# Altium PCB radxa_nx5_io_board_v1.4.PcbDoc (part 5 of 6)
Units mil, origin at the board's own origin, x right, y up, seen from the top; angles counter-clockwise.
Board outline 3937.73 x 3112.19 mil, 6 copper layers (Top, GND02, 内层3, Power4, 内层 5, Bottom), stack 58.1 mil thick; 363 components, 344 nets, 1618 pads, 1594 vias.
Unrouted connection lines stored in the file: 899.
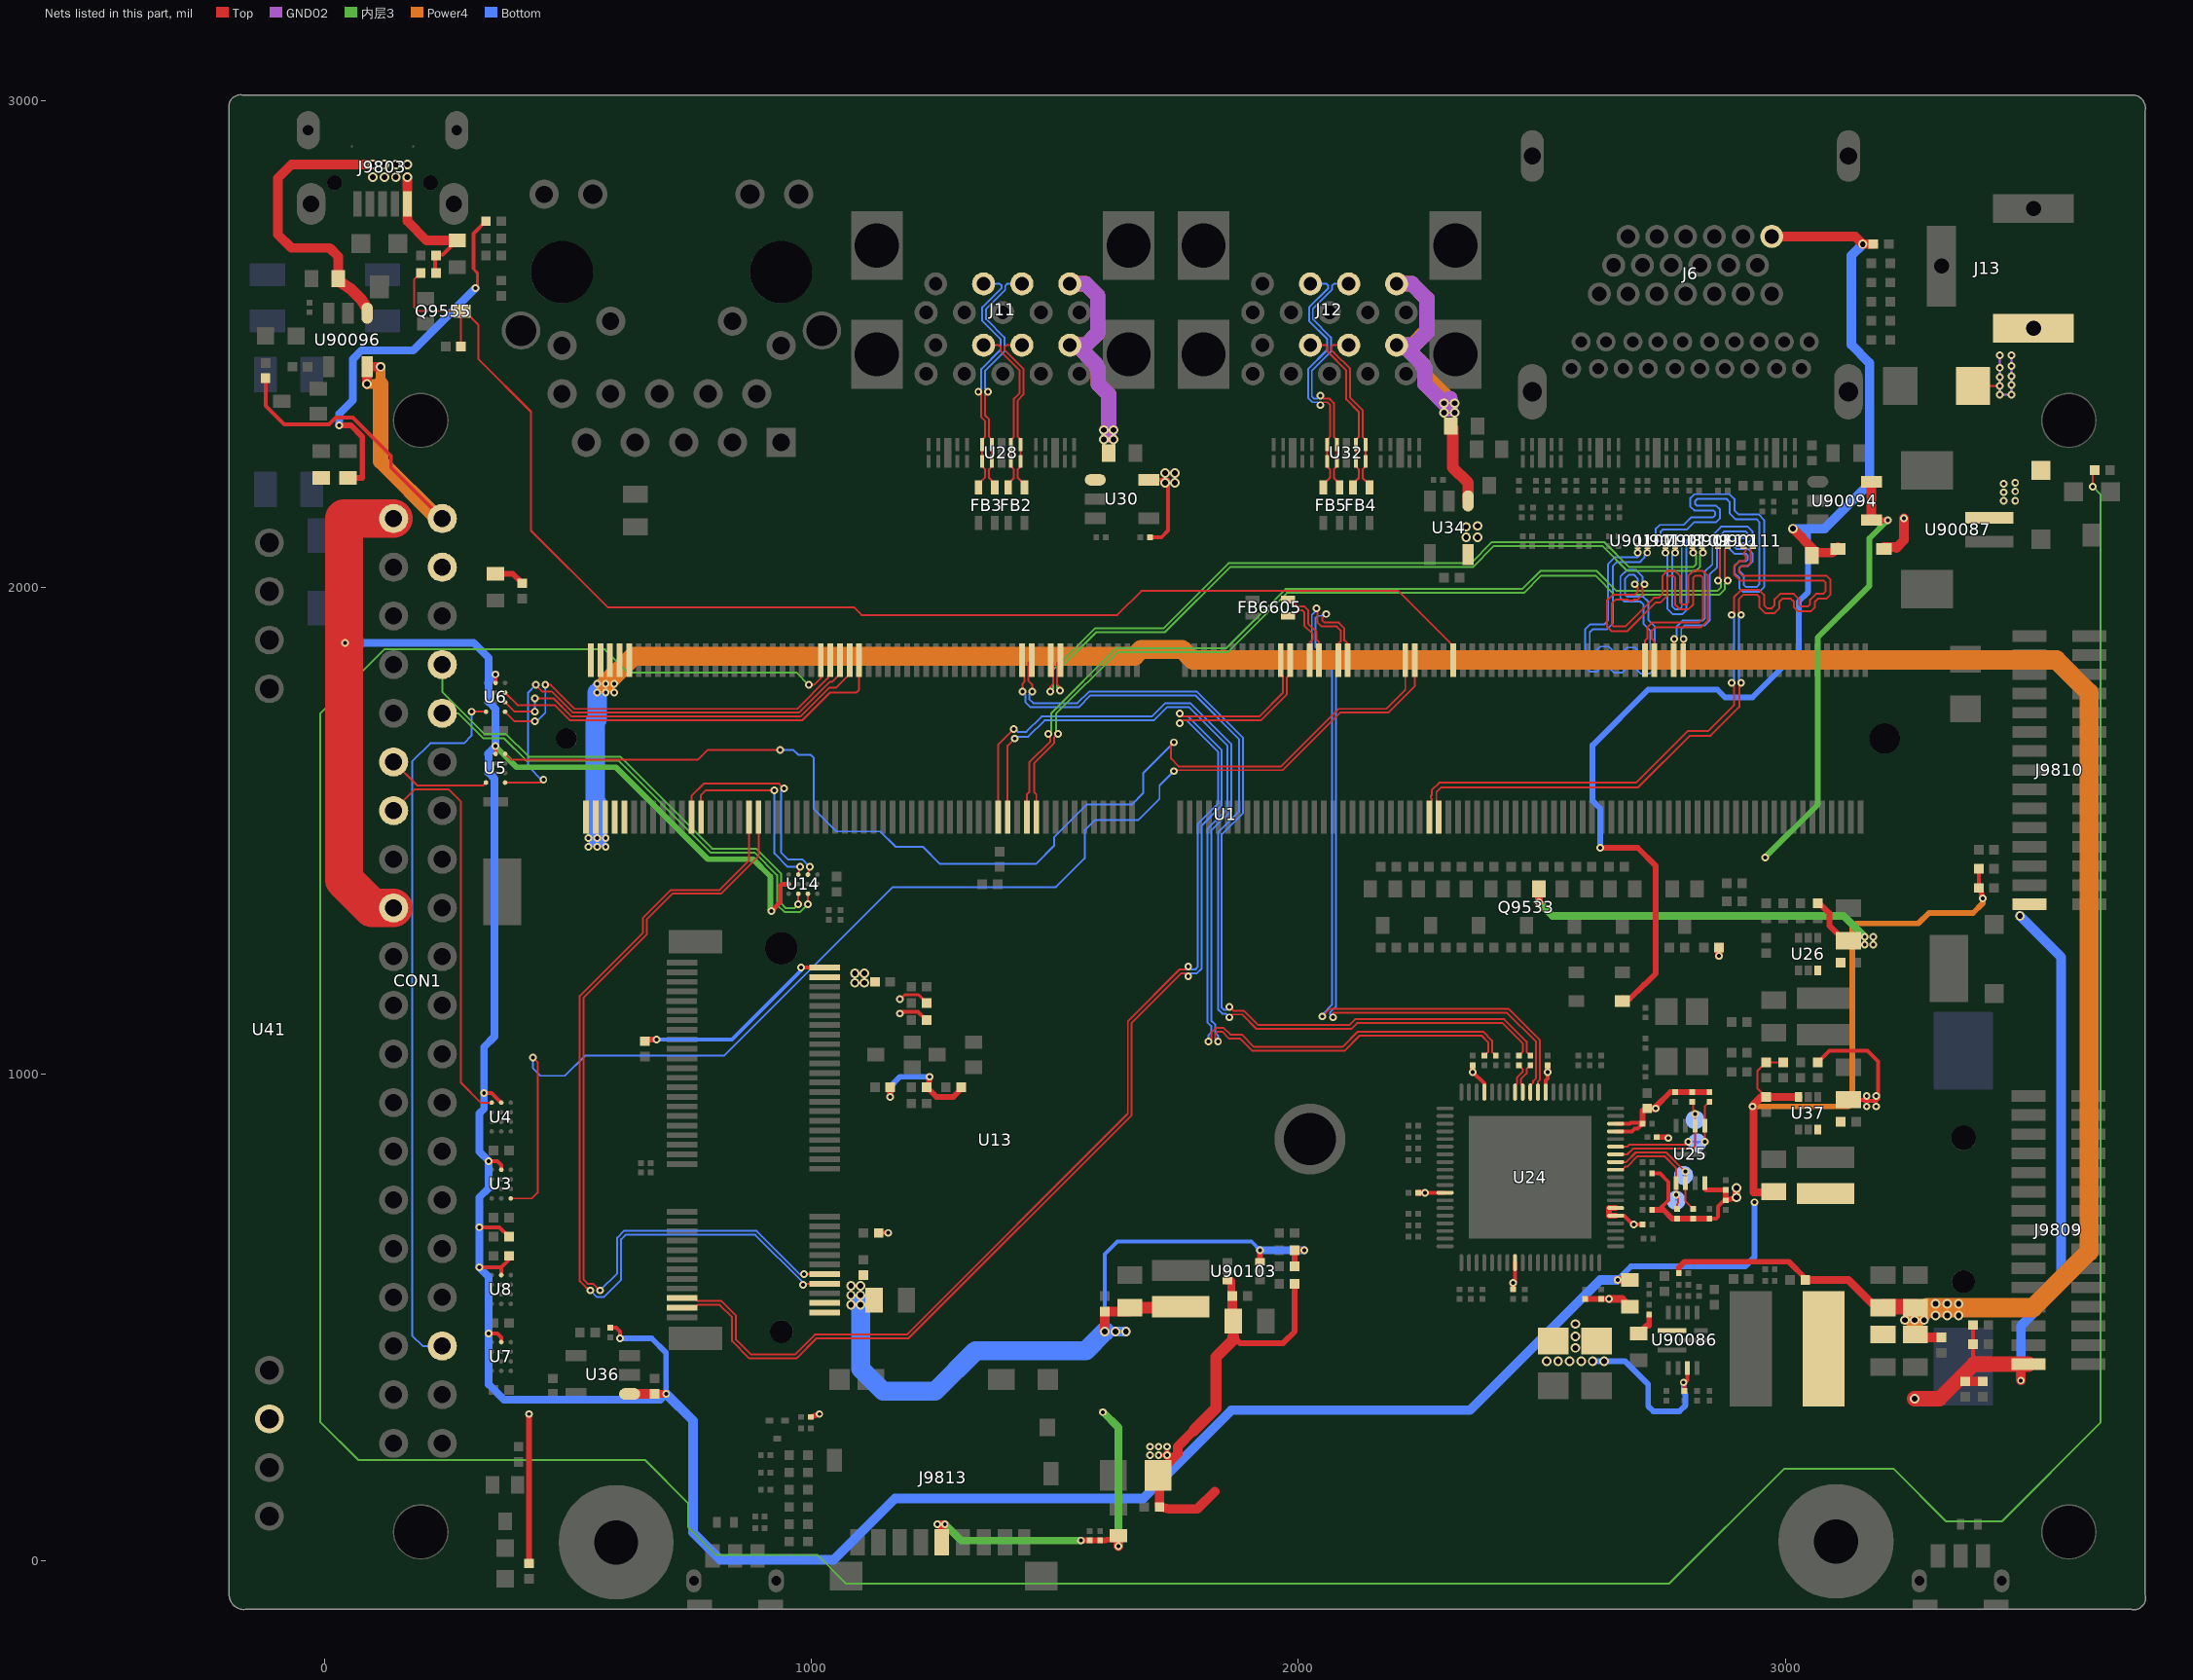
[diagram p8: the nets of this part, all layers, seen from the top]

## Via types
v1: diameter 15.75, hole 7.87, Top to Bottom, 1425 vias
v2: diameter 19.68, hole 11.81, Top to Bottom, 169 vias

## Nets (pads, with @x,y where several pads share a name; then routed paths per layer and width w, separated by ;. In a path a pad name is that pad's centre, name@x,y a point inside that pad or via, vN(x,y) a via of type N, cw(c..) or ccw(c..) an arc to the next point about the centre after c; other vN are vias at no path point) (continued)
SPI1-SCK: CON1.13 U4.A1 | length 824.6
  Top w3.94: CON1.13@140.94,1540.94 184.65,1584.65 253.94,1584.65 279.53,1559.06 279.53,981.61 320.19,940.94 U4.A1@342.52,940.94
SPI_CK: R107.1 TP3.1 U24.50 U25.6 | length 261.2
  Top w3.94: U24.50@2651.57,818.9 2673.23,818.9 2692.91,838.58 2755.23,838.58 v1@2795.28,798.54 ; v1(2795.28,799.21) v1@2795.28,798.54 ; R107.1@2811.02,722.44 2795.28,738.19 U25.6@2795.28,775.59 v1@2795.28,798.54
  Bottom w3.94: TP3.1@2791.34,791.34 2795.28,795.28 v1(2795.28,799.21)
SPI_CZ: R102.2 TP1.1 U24.52 U25.1 | length 301.4
  Top w3.94: U24.52@2651.57,850.39 2675.2,850.39 2679.13,854.33 2795.28,854.33 v1(2801.18,860.24) ; v1(2834.65,860.24) U25.1@2834.65,893.7 2834.65,933.07 R102.2@2844.49,942.91
  Bottom w3.94: TP1.1@2818.9,858.27 2821.41,858.27 2823.38,860.24 v1(2801.18,860.24) v1(2834.65,860.24)
SPI_DI: R104.2 TP2.1 U24.51 U25.2 | length 275.5
  Top w3.94: U24.51@2651.57,834.65 2675.2,834.65 2687.01,846.46 2809.06,846.46 2814.96,852.36 U25.2@2814.96,893.7 v1(2814.96,917.32) 2811.02,921.26 2811.02,940.94 R104.2@2809.06,942.91
  Bottom w3.94: TP2.1@2814.96,905.51 v1(2814.96,917.32)
SPI_DO: R108.1 TP4.1 U24.49 U25.5 | length 244.1
  Top w3.94: U24.49@2651.57,803.15 2665.35,803.15 2671.38,809.17 2675.32,809.17 2696.85,830.71 2751.97,830.71 2775.59,807.09 U25.5@2775.59,775.59 v1(2775.59,751.97) 2779.53,748.03 2779.53,734.25 2777.56,732.28 R108.1@2777.56,722.44
  Bottom w3.94: TP4.1@2775.59,740.16 v1(2775.59,751.97)
TP_INT_L: U1.97 U5.A3 | length 2333.7
  Top w3.94: U5.A3@370.08,1657.48 381.89,1645.67 766.42,1645.67 786.11,1665.35 v1(935.04,1665.35) ; v1(1744.09,1681.1) 1738.19,1675.2 1738.19,1647.64 1753.94,1631.89 1964.32,1631.89 2082.43,1750 2180.12,1750 2219.49,1789.37 U1.97@2219.49,1850.39
  Bottom w3.94: v1(935.04,1665.35) 962.6,1665.35 972.44,1655.51 998.03,1655.51 1003.94,1649.61 1003.94,1544.66 1050.56,1498.03 1140.75,1498.03 1172.24,1466.54 1228.35,1466.54 1263.78,1431.1 1460.63,1431.1 1498.03,1468.5 1498.03,1486.22 1564.96,1553.15 1657.48,1553.15 1681.1,1576.77 1681.1,1618.11 v1(1744.09,1681.1)
TP_RST_L: U1.95 U3.D3 | length 2616.3
  Top w3.94: U3.D3@381.89,744.09 425.2,744.09 437.01,755.91 437.01,1023.62 v1(427.17,1033.46) ; v1(1744.09,1622.05) 1746.06,1624.02 1967.58,1624.02 2085.69,1742.13 2184.06,1742.13 2239.17,1797.24 U1.95@2239.17,1850.39
  Bottom w3.94: v1(427.17,1033.46) 427.17,1011.81 442.91,996.06 492.86,996.06 534.2,1037.4 819.97,1037.4 1166.43,1383.86 1501.97,1383.86 1561.02,1442.91 1561.02,1499.74 1582.93,1521.65 1671.26,1521.65 1714.57,1564.96 1714.57,1592.52 v1(1744.09,1622.05)
TX_UP_N: C69.2 U24.68 | length 64.9
  Top w3.94: U24.68@2460.63,962.6 2460.63,976.38 2456.69,980.32 2456.69,988.86 2468.5,1000.68 2468.5,1009.84 C69.2@2476.38,1017.72
TX_UP_P: C68.2 U24.69 | length 64.9
  Top w3.94: U24.69@2444.88,962.6 2444.88,976.38 2448.82,980.32 2448.82,992.13 2460.63,1003.94 2460.63,1009.84 C68.2@2452.76,1017.72
TYPEC0_DM1: FB2.1 J11.2 U28.5 U28.6 | length 358.4
  Top w3.94: J11.2@1431.89,2497.24 1399.61,2497.24 1395.67,2493.31 1395.67,2487.93 1401.32,2482.28 1401.57,2482.28 1435.04,2448.82 1435.04,2395.67 1423.23,2383.86 1423.23,2309.06 1429.13,2303.15 U28.6@1429.13,2292.82 U28.5@1429.13,2258.37 1429.13,2248.03 1423.23,2242.13 1423.23,2224.41 1437.01,2210.63 FB2.1@1437.01,2204.72
TYPEC0_DM3: FB4.1 J12.2 U32.5 U32.6 | length 364.1
  Top w3.94: J12.2@2103.15,2497.24 2070.87,2497.24 2066.93,2493.31 2066.93,2487.93 2072.58,2482.28 2072.83,2482.28 2106.3,2448.82 2106.3,2389.09 2131.89,2363.5 2131.89,2309.06 2137.8,2303.15 U32.6@2137.8,2292.82 U32.5@2137.8,2258.37 2137.8,2248.03 2131.89,2242.13 2131.89,2224.41 2145.67,2210.63 FB4.1@2145.67,2204.72
TYPEC0_DP1: FB2.3 J11.3 U28.4 U28.7 | length 356.3
  Top w3.94: J11.3@1353.15,2497.24 1384.65,2497.24 1387.8,2494.09 1387.8,2484.67 1427.17,2445.3 1427.17,2398.93 1415.35,2387.12 1415.35,2309.06 1409.45,2303.15 U28.7@1409.45,2292.82 U28.4@1409.45,2258.37 1409.45,2248.03 1415.35,2242.13 1415.35,2224.41 1403.54,2212.6 FB2.3@1403.54,2204.72
TYPEC0_DP3: FB4.3 J12.3 U32.4 U32.7 | length 362
  Top w3.94: J12.3@2024.41,2497.24 2055.91,2497.24 2059.06,2494.09 2059.06,2484.67 2098.43,2445.3 2098.43,2385.83 2124.02,2360.24 2124.02,2309.06 2118.11,2303.15 U32.7@2118.11,2292.82 U32.4@2118.11,2258.37 2118.11,2248.03 2124.02,2242.13 2124.02,2224.41 2112.2,2212.6 FB4.3@2112.2,2204.72
TYPEC0_OTG_DM: FB6605.2 U1.115 | length 162
  Top w3.94: FB6605.2@1978.35,1974.41 1984.25,1974.41 1998.03,1960.63 2011.81,1960.63 2019.69,1952.76 2019.69,1925.2 2037.4,1907.48 2037.4,1891.73 2042.32,1886.81 U1.115@2042.32,1850.39
TYPEC0_OTG_DP: FB6605.4 U1.117 | length 148.6
  Top w3.94: FB6605.4@1978.35,1940.94 1986.22,1940.94 1998.03,1952.76 2007.87,1952.76 2011.81,1948.82 2011.81,1921.26 2029.53,1903.54 2029.53,1892.72 2022.64,1885.83 U1.117@2022.64,1850.39
TYPEC0_SBU1: R95225.1 U1.92 U90111.3 | length 1555.1
  Top w3.94: U1.92@2268.7,1527.56 2268.7,1557.09 2273.62,1562.01 2273.62,1564.96 2271.65,1566.93 2271.65,1570.87 2273.62,1572.83 2273.62,1582.68 2289.37,1598.43 2693.9,1598.43 2800.2,1704.72 2842.38,1704.72 2894.69,1757.03 2894.69,1798.23 v1(2889.76,1803.15) ; v1(2889.76,1942.91) 2894.69,1947.83 2894.69,1979.47 2909.31,1994.09 2946.85,1994.09 2956.69,1984.25 2956.69,1962.6 2962.6,1956.69 2972.44,1956.69 2978.35,1962.6 2978.35,1975.14 2989.43,1986.22 3017.72,1986.22 3027.56,1976.38 3027.56,1964.57 3031.5,1960.63 3047.24,1960.63 3051.18,1964.57 3051.18,1974.41 3062.99,1986.22 3077.97,1986.22 3082.68,1990.93 3082.68,2009.84 3078.74,2013.78 2907.34,2013.78 2894.69,2026.43 2894.69,2041.48 2906.36,2053.15 2915.35,2053.15 2919.29,2057.09 2919.29,2062.99 2915.35,2066.93 2915.35,2070.87 2919.29,2074.8 2919.29,2081.5 U90111.3@2916.14,2084.65 R95225.1@2913.39,2084.65
  Bottom w3.94: v1(2889.76,1803.15) 2894.69,1808.07 2894.69,1937.99 v1(2889.76,1942.91)
TYPEC0_SBU1_DC: U1.224 U13.10 | length 1792.2
  Top w3.94: v1(564.96,555.12) 551.18,568.9 539.57,568.9 531.5,576.97 531.5,1154.53 531.5,1156.85 661.42,1286.77 661.42,1317.66 713.83,1370.08 814.09,1370.08 890.75,1446.73 U1.224@890.75,1527.56 ; v1(984.25,588.58) U13.10@1026.58,588.58
  Bottom w3.94: v1(564.96,555.12) 600.39,590.55 600.39,663.44 614.12,677.17 887.12,677.17 975.7,588.58 v1(984.25,588.58)
TYPEC0_SBU2: R95226.1 U1.90 U90111.4 | length 1556.1
  Top w3.94: U1.90@2288.39,1527.56 2288.39,1557.09 2283.46,1562.01 2283.46,1578.6 2293.45,1588.58 2697.97,1588.58 2804.27,1694.88 2846.46,1694.88 2905.51,1753.94 2905.51,1799.21 v1(2909.45,1803.15) ; v1(2909.45,1942.91) 2904.53,1947.83 2904.53,1975.39 2913.39,1984.25 2942.91,1984.25 2946.85,1980.32 2946.85,1958.66 2958.66,1946.85 2978.35,1946.85 2988.19,1956.69 2988.19,1970.47 2994.09,1976.38 3011.81,1976.38 3017.72,1970.47 3017.72,1958.66 3025.59,1950.79 3053.15,1950.79 3061.02,1958.66 3061.02,1970.47 3066.93,1976.38 3084.65,1976.38 3092.52,1984.25 3092.52,2015.75 3084.65,2023.62 2911.42,2023.62 2904.53,2030.51 2904.53,2037.4 2910.43,2043.31 2921.26,2043.31 2929.13,2051.18 2929.13,2078.74 U90111.4@2935.04,2084.65 R95226.1@2933.07,2084.65
  Bottom w3.94: v1(2909.45,1803.15) 2904.53,1808.07 2904.53,1937.99 v1(2909.45,1942.91)
TYPEC0_SBU2_DC: U1.226 U13.8 | length 1821.1
  Top w3.94: v1(545.28,555.12) 544.22,554.06 537.26,561.02 536.31,561.02 523.62,573.71 523.62,1157.79 523.62,1160.11 653.54,1290.04 653.54,1320.92 710.57,1377.95 810.83,1377.95 871.06,1438.19 U1.226@871.06,1527.56 ; v1(982.28,566.93) 984.25,568.9 U13.8@1026.58,568.9
  Bottom w3.94: v1(545.28,555.12) 559.06,541.34 572.83,541.34 608.27,576.77 608.27,660.18 617.38,669.29 883.86,669.29 980.32,572.83 980.32,568.9 v1(982.28,566.93)
TYPEC0_SSRX1N: R95218.1 U1.45 U90107.4 | length 1715
  Top w3.94: v1(2710.63,2005.91) 2706.69,2001.97 2706.69,1984.25 2696.85,1974.41 2688.98,1974.41 2687.01,1972.44 2679.13,1972.44 2677.17,1974.41 2651.57,1974.41 2643.7,1966.54 2643.7,1923.23 2647.64,1919.29 2671.26,1919.29 2730.32,1978.35 2740.16,1978.35 2748.03,1986.22 2748.03,2023.76 2757.73,2033.46 2773.76,2033.46 2783.46,2023.76 2783.46,1968.5 2787.4,1964.57 2797.24,1964.57 2801.18,1968.5 2801.18,2023.62 2811.02,2033.46 2830.71,2033.46 2840.55,2023.62 2840.55,1931.1 2826.77,1917.32 2732.28,1917.32 2726.38,1911.42 2726.38,1893.7 2731.3,1888.78 U1.45@2731.3,1850.39 ; v1(2716.54,2070.87) U90107.4@2716.54,2084.65
  Bottom w3.94: v1(2710.63,2005.91) 2706.69,2009.84 2706.69,2021.79 2693.05,2035.43 2675.06,2035.43 2661.42,2021.79 2661.42,1978.35 2669.29,1970.47 2702.76,1970.47 2708.66,1964.57 2708.66,1925.2 2722.44,1911.42 2722.44,1838.58 2716.54,1832.68 2707.29,1832.68 2702.76,1837.21 2702.76,1864.17 2690.94,1875.98 2675.2,1875.98 2665.35,1866.14 2665.35,1838.58 2661.42,1834.65 2651.57,1834.65 2647.64,1838.58 2647.64,1868.11 2637.8,1877.95 2620.08,1877.95 2612.2,1870.08 2612.2,1840.55 2608.27,1836.61 2602.36,1836.61 2598.43,1840.55 2598.43,1907.48 2604.33,1913.39 2633.86,1913.39 2645.67,1925.2 2645.67,2043.17 2653.68,2051.18 2700.93,2051.18 2710.63,2060.88 2710.63,2064.96 v1(2716.54,2070.87)
TYPEC0_SSRX1P: R95217.1 U1.47 U90107.3 | length 1717.4
  Top w3.94: v1(2690.94,2005.91) 2696.85,2000 2696.85,1990.16 2690.94,1984.25 2645.67,1984.25 2633.86,1972.44 2633.86,1919.15 2643.56,1909.45 2675.34,1909.45 2734.39,1968.5 2744.23,1968.5 2757.87,1982.14 2757.87,2019.69 2761.81,2023.62 2769.69,2023.62 2773.62,2019.69 2773.62,1964.43 2783.32,1954.72 2801.32,1954.72 2811.02,1964.43 2811.02,2019.55 2815.1,2023.62 2826.63,2023.62 2830.71,2019.55 2830.71,1935.04 2822.83,1927.17 2726.38,1927.17 2716.54,1917.32 2716.54,1894.69 2711.61,1889.76 U1.47@2711.61,1850.39 ; v1(2696.85,2070.87) 2696.85,2083.86 U90107.3@2697.64,2084.65 R95217.1@2696.85,2084.65
  Bottom w3.94: v1(2690.94,2005.91) 2696.85,2011.81 2696.85,2017.72 2688.98,2025.59 2679.13,2025.59 2671.26,2017.72 2671.26,1984.25 2675.2,1980.32 2708.66,1980.32 2718.5,1970.47 2718.5,1933.07 2732.28,1919.29 2732.28,1832.68 2722.44,1822.83 2702.76,1822.83 2692.91,1832.68 2692.91,1860.24 2687.01,1866.14 2679.13,1866.14 2675.2,1862.2 2675.2,1834.65 2665.35,1824.8 2647.64,1824.8 2637.8,1834.65 2637.8,1864.17 2633.86,1868.11 2625.98,1868.11 2622.05,1864.17 2622.05,1835.29 2613.53,1826.77 2598.43,1826.77 2588.58,1836.61 2588.58,1913.39 2598.43,1923.23 2627.95,1923.23 2635.83,1931.1 2635.83,2047.24 2649.61,2061.02 2696.85,2061.02 2700.79,2064.96 2700.79,2066.93 v1(2696.85,2070.87)
TYPEC0_SSRX2N: R95222.1 U1.161 U90109.4 | length 1612.6
  Top w3.94: v1(1509.84,1787.4) 1509.84,1795.28 1503.94,1801.18 1503.94,1843.5 U1.161@1510.83,1850.39 ; U90109.4@2828.74,2084.65 2828.74,2072.83 v1(2830.71,2070.87)
  内层3 w3.94: v1(1509.84,1787.4) 1505.91,1791.34 1503.94,1789.37 1503.94,1826.57 1584.84,1907.48 1725.7,1907.48 1859.56,2041.34 2358.27,2041.34 2401.57,2084.65 2624.02,2084.65 2675.2,2033.46 2816.93,2033.46 2824.8,2041.34 2824.8,2064.96 v1(2830.71,2070.87)
TYPEC0_SSRX2P: R95221.1 U1.163 U90109.3 | length 1610.7
  Top w3.94: v1(1490.16,1785.43) 1490.16,1795.28 1496.06,1801.18 1496.06,1845.47 U1.163@1491.14,1850.39 ; R95221.1@2809.06,2084.65 U90109.3@2809.84,2084.65 2809.84,2072.05 v1(2811.02,2070.87)
  内层3 w3.94: v1(1490.16,1785.43) 1496.06,1791.34 1496.06,1829.84 1581.58,1915.35 1722.44,1915.35 1856.3,2049.21 2354.33,2049.21 2397.64,2092.52 2627.95,2092.52 2679.13,2041.34 2811.02,2041.34 2816.93,2047.24 2816.93,2064.96 v1(2811.02,2070.87)
TYPEC0_SSTX1N: R95220.1 U1.39 U90108.4 | length 1529.8
  Top w3.94: v1(2773.62,2070.87) U90108.4@2773.62,2084.65 ; U1.39@2790.35,1850.39 2790.35,1892.72 v1(2791.34,1893.7)
  Bottom w3.94: v1(2773.62,2070.87) 2767.72,2064.96 2767.72,1960.63 2773.62,1954.72 2783.46,1954.72 2787.4,1958.66 2787.4,2088.1 2781.01,2094.49 2740.8,2094.49 2734.25,2101.03 2734.25,2120.08 2742.13,2127.95 2791.34,2127.95 2807.09,2143.7 2852.36,2143.7 2856.3,2147.64 2856.3,2153.54 2852.36,2157.48 2812.99,2157.48 2805.12,2165.35 2805.12,2183.07 2812.99,2190.94 2885.83,2190.94 2895.67,2181.1 2895.67,2157.48 2903.54,2149.61 2945.02,2149.61 2956.69,2137.94 2956.69,2000 2946.85,1990.16 2913.39,1990.16 2905.51,1998.03 2905.51,2019.69 2905.44,2019.69 2895.74,2029.39 2895.74,2043.52 2905.37,2053.15 2919.29,2053.15 2923.23,2057.09 2923.23,2064.96 2919.29,2068.9 2895.53,2068.9 2885.83,2078.6 2885.83,2090.69 2895.53,2100.39 2919.29,2100.39 2923.23,2104.33 2923.23,2110.24 2919.29,2114.17 2874.02,2114.17 2860.24,2100.39 2860.24,2041.34 2844.49,2025.59 2844.49,1930.96 2834.79,1921.26 2793.31,1921.26 2786.42,1914.37 2786.42,1898.62 v1(2791.34,1893.7)
TYPEC0_SSTX1P: R95219.1 U1.41 U90108.3 | length 1528.9
  Top w3.94: v1(2753.94,2070.87) 2753.94,2083.86 U90108.3@2754.72,2084.65 R95219.1@2753.94,2084.65 ; U1.41@2770.67,1850.39 2770.67,1892.72 v1(2771.65,1893.7)
  Bottom w3.94: v1(2753.94,2070.87) 2757.87,2066.93 2757.87,1955.72 2768.72,1944.88 2789.28,1944.88 2797.24,1952.85 2797.24,2094.49 2787.4,2104.33 2748.03,2104.33 2744.09,2108.27 2744.09,2114.17 2748.03,2118.11 2797.24,2118.11 2812.99,2133.86 2858.27,2133.86 2866.14,2141.73 2866.14,2159.45 2858.27,2167.32 2818.9,2167.32 2814.96,2171.26 2814.96,2177.17 2818.9,2181.1 2879.92,2181.1 2885.83,2175.2 2885.83,2151.57 2897.64,2139.76 2940.94,2139.76 2946.85,2133.86 2946.85,2005.91 2940.94,2000 2919.29,2000 2915.35,2003.94 2915.35,2023.69 2905.58,2033.46 2905.58,2039.44 2909.45,2043.31 2923.37,2043.31 2933.07,2053.01 2933.07,2069.04 2923.37,2078.74 2899.61,2078.74 2895.67,2082.68 2895.67,2086.61 2899.61,2090.55 2923.37,2090.55 2933.07,2100.25 2933.07,2114.31 2923.37,2124.02 2868.11,2124.02 2850.39,2106.3 2850.39,2047.24 2834.65,2031.5 2834.65,1935.04 2830.71,1931.1 2789.23,1931.1 2776.57,1918.45 2776.57,1898.62 v1(2771.65,1893.7)
TYPEC0_SSTX2N: R95224.1 U1.166 U90110.4 | length 1847.4
  Top w3.94: U1.166@1461.61,1527.56 1461.61,1573.82 1456.69,1578.74 1456.69,1637.8 1498.03,1679.13 1498.03,1690.94 v1(1505.91,1698.82) ; v1(2881.89,2013.78) 2875.98,2019.69 2875.98,2078.74 U90110.4@2881.89,2084.65
  内层3 w3.94: v1(1505.91,1698.82) 1501.97,1698.82 1501.97,1739.96 1628.15,1866.14 1854.33,1866.14 1976.38,1988.19 2463.02,1988.19 2498.45,2023.62 2610.24,2023.62 2649.61,1984.25 2864.17,1984.25 2875.98,1996.06 2875.98,2007.87 v1(2881.89,2013.78)
TYPEC0_SSTX2P: R95223.1 U1.168 U90110.3 | length 1845.4
  Top w3.94: U1.168@1441.93,1527.56 1441.93,1573.82 1446.85,1578.74 1446.85,1639.76 1490.16,1683.07 1490.16,1694.88 v1(1486.22,1698.82) ; v1(2862.2,2013.78) 2866.14,2019.69 2866.14,2078.74 R95223.1@2862.2,2084.65 U90110.3@2862.99,2084.65
  内层3 w3.94: v1(1486.22,1698.82) 1492.13,1704.72 1492.13,1741.25 1624.89,1874.02 1851.07,1874.02 1973.12,1996.06 2459.76,1996.06 2497.16,2033.46 2612.2,2033.46 2653.54,1992.13 2860.24,1992.13 2868.11,2000 2868.11,2007.87 v1(2862.2,2013.78)
UART1-CTS: CON1.36 U6.D1 | length 1472.7
  Top w3.94: v1(301.18,1744.09) U6.D1@330.71,1744.09
  Bottom w3.94: CON1.36@240.94,440.94 200.79,440.94 179.13,462.6 179.13,1641.73 216.54,1679.13 285.43,1679.13 301.18,1694.88 v1(301.18,1744.09)
UART1-RTS: CON1.11 U5.D1 | length 212.3
  Top w3.94: CON1.11@140.94,1640.94 189.37,1592.52 324.8,1592.52 U5.D1@330.71,1598.43
UART2-RX: U1.238 U14.C3 | length 470
  Top w3.94: U1.238@752.95,1527.56 752.95,1571.17 778.23,1596.46 933.07,1596.46 v1(942.91,1586.61) ; U14.C3@992.13,1409.45 v1(996.06,1425.2)
  Bottom w3.94: v1(942.91,1586.61) 937.01,1580.71 937.01,1454.72 950.79,1440.94 980.32,1440.94 v1(996.06,1425.2)
UART2-RX/: CON1.10 U14.C1 | length 984.3
  Top w3.94: v1(992.13,1348.43) U14.C1@992.13,1370.08
  内层3 w3.94: CON1.10@240.94,1740.94 273.71,1740.94 324.8,1689.85 367.24,1689.85 413.39,1643.7 603.04,1643.7 792.01,1454.72 882.85,1454.72 929.13,1408.44 929.13,1347.33 943.79,1332.68 976.38,1332.68 v1(992.13,1348.43)
UART2-TX: U1.236 U14.B3 | length 410.7
  Top w3.94: U1.236@772.64,1527.56 772.64,1572.83 782.48,1582.68 v1(923.23,1582.68) ; U14.B3@972.44,1409.45 v1(976.38,1425.2)
  Bottom w3.94: v1(923.23,1582.68) 923.23,1452.76 950.79,1425.2 v1(976.38,1425.2)
UART2-TX/: CON1.8 U14.B1 | length 1032.3
  Top w3.94: v1(972.44,1348.43) U14.B1@972.44,1370.08
  内层3 w3.94: CON1.8@240.94,1840.94 240.94,1784.84 326.97,1698.82 371.06,1698.82 418.31,1651.57 606.3,1651.57 795.28,1462.6 886.11,1462.6 937.01,1411.7 937.01,1350.59 947.05,1340.55 964.57,1340.55 v1(972.44,1348.43)
UART9-CTSN: U1.209 U6.D3 | length 821.8
  Top w3.94: U6.D3@370.08,1744.09 389.76,1724.41 v1(431.1,1724.41) ; v1(452.76,1799.21) 463.95,1799.21 513.16,1750 970.41,1750 1033.06,1812.64 1033.06,1817.46 1038.39,1822.79 U1.209@1038.39,1850.39
  Bottom w3.94: v1(431.1,1724.41) 435.04,1724.41 452.76,1742.13 v1(452.76,1799.21)
UART9-RTSN: U1.207 U5.D3 | length 1010.1
  Top w3.94: U5.D3@370.08,1598.43 442.91,1598.43 v1(448.82,1604.33) ; v1(433.07,1799.21) 446.85,1785.43 466.59,1785.43 509.9,1742.13 973.68,1742.13 1036.67,1805.12 1041.82,1805.12 1050.77,1814.08 1050.77,1814.55 1058.07,1821.85 U1.207@1058.07,1850.39
  Bottom w3.94: v1(433.07,1799.21) 417.32,1783.46 417.32,1631.89 446.85,1602.36 v1(448.82,1604.33)
UART9-RX: U1.205 U6.C3 | length 824
  Top w3.94: U6.C3@370.08,1763.78 389.76,1744.09 v1(431.1,1744.09) ; v1(431.1,1771.65) 469.24,1771.65 506.64,1734.25 976.94,1734.25 1035.99,1793.31 1049.69,1793.31 1077.76,1821.37 U1.205@1077.76,1850.39
  Bottom w3.94: v1(431.1,1744.09) v1(431.1,1771.65)
UART9-TX: U1.203 U6.B3 | length 838.1
  Top w3.94: U6.B3@370.08,1783.46 395.67,1757.87 471.88,1757.87 503.38,1726.38 980.2,1726.38 1037.29,1783.46 1091.54,1783.46 1097.44,1789.37 U1.203@1097.44,1850.39
USB3_DM1: FB3.1 J11.13 U28.2 U28.9 | length 516.5
  Top w3.94: v1(1362.2,2401.57) 1356.3,2395.67 1356.3,2352.36 1364.17,2344.49 1364.17,2309.06 1370.08,2303.15 U28.9@1370.08,2292.82 U28.2@1370.08,2258.37 1370.08,2248.03 1364.17,2242.13 1364.17,2224.41 1375.98,2212.6 FB3.1@1375.98,2204.72
  Bottom w3.94: v1(1362.2,2401.57) 1356.3,2407.48 1356.3,2444.77 1395.67,2484.14 1395.67,2513.1 1358.27,2550.51 1358.27,2571.68 1397.64,2611.05 1397.64,2619.29 1401.57,2623.23 J11.13@1431.89,2623.23
USB3_DM4: FB5.1 J12.13 U32.2 U32.9 | length 550.4
  Top w3.94: v1(2045.28,2393.7) 2051.18,2387.8 2062.99,2387.8 2072.83,2377.95 2072.83,2309.06 2078.74,2303.15 U32.9@2078.74,2292.82 U32.2@2078.74,2258.37 2078.74,2248.03 2072.83,2242.13 2072.83,2224.41 2084.65,2212.6 FB5.1@2084.65,2204.72
  Bottom w3.94: v1(2045.28,2393.7) 2039.37,2387.8 2031.5,2387.8 2027.56,2391.73 2027.56,2444.77 2066.93,2484.14 2066.93,2513.1 2029.53,2550.51 2029.53,2571.68 2068.9,2611.05 2068.9,2619.29 2072.83,2623.23 J12.13@2103.15,2623.23
USB3_DP1: FB3.3 J11.14 U28.1 U28.10 | length 520.6
  Top w3.94: FB3.3@1342.52,2204.72 1343.34,2204.72 1343.34,2212.6 1356.3,2225.56 1356.3,2242.13 1350.39,2248.03 U28.1@1350.39,2258.37 U28.10@1350.39,2292.82 1350.39,2303.15 1356.3,2309.06 1356.3,2341.23 1348.43,2349.1 1348.43,2395.67 v1(1342.52,2401.57)
  Bottom w3.94: v1(1342.52,2401.57) 1348.43,2407.48 1348.43,2448.03 1387.8,2487.4 1387.8,2509.84 1350.39,2547.24 1350.39,2574.94 1389.76,2614.31 1389.76,2620.08 1386.61,2623.23 J11.14@1353.15,2623.23
USB3_DP4: FB5.3 J12.14 U32.1 U32.10 | length 554.1
  Top w3.94: v1(2045.28,2374.02) 2051.18,2379.92 2059.73,2379.92 2064.96,2374.69 2064.96,2309.06 2059.06,2303.15 U32.10@2059.06,2292.82 U32.1@2059.06,2258.37 2059.06,2248.03 2064.96,2242.13 2064.96,2224.41 2051.18,2210.63 FB5.3@2051.18,2204.72
  Bottom w3.94: J12.14@2024.41,2623.23 2057.87,2623.23 2061.02,2620.08 2061.02,2614.31 2021.65,2574.94 2021.65,2547.24 2059.06,2509.84 2059.06,2487.4 2019.69,2448.03 2019.69,2388.47 2028.23,2379.92 2039.37,2379.92 v1(2045.28,2374.02)
USB5V-CON2: C108.1 J12.1 J12.12 U34.1 | length 1089.4
  Top w23.62: C108.1@2312.99,2330.71 2316.93,2326.77 2316.93,2246.06 2348.43,2214.57 U34.1@2348.43,2177.17
  GND02 w3.94: v2(2299.21,2377.95) v2(2320.87,2358.27) ; 2311.02,2387.8 v2(2320.87,2377.95)
  GND02 w31.5: J12.12@2201.57,2623.23 2233.07,2623.23 2263.78,2592.52 2263.78,2522.83 2238.19,2497.24 J12.1@2201.57,2497.24 2215.67,2497.24 2255.91,2457 2255.91,2452.89 2259.84,2448.95 2259.84,2417.32 2311.02,2366.14 2311.02,2387.8
  Power4 w3.94: v2(2299.21,2358.27) 2311.02,2370.08 v2(2320.87,2377.95) ; v2(2299.21,2377.95) v2(2320.87,2358.27)
  Power4 w31.5: J12.12@2201.57,2623.23 2233.07,2623.23 2263.78,2592.52 2263.78,2526.77 2234.25,2497.24 J12.1@2201.57,2497.24 2215.67,2497.24 2246.91,2466 2255.91,2456.44 2255.91,2452.28 2259.84,2448.34 2259.84,2435.04 2311.02,2383.86 2311.02,2370.08
USB5V_CON1: C107.1 J11.1 J11.12 U30.1 | length 985.2
  GND02 w7.87: v2(1600.39,2303.15) v2(1620.08,2322.83) ; v2(1600.39,2322.83) 1610.24,2312.99 v2(1620.08,2303.15)
  GND02 w31.5: J11.12@1530.32,2623.23 1562.6,2623.23 1587.4,2598.43 1587.4,2521.65 1562.99,2497.24 J11.1@1530.32,2497.24 1544.41,2497.24 1584.65,2457 1584.65,2452.89 1588.58,2448.95 1588.58,2417.32 1610.24,2395.67 1610.24,2312.99
  Power4 w3.94: v2(1600.39,2303.15) v2(1620.08,2322.83) ; v2(1600.39,2322.83) 1610.24,2312.99 v2(1620.08,2303.15)
  Power4 w31.5: J11.12@1530.32,2623.23 1562.6,2623.23 1587.4,2598.43 1587.4,2521.65 1562.99,2497.24 J11.1@1530.32,2497.24 1544.41,2497.24 1584.65,2457 1584.65,2452.89 1588.58,2448.95 1588.58,2417.32 1610.24,2395.67 1610.24,2312.99
USB20_HOST0_DM: U1.109 U24.67 | length 1567.5
  Top w3.94: v1(2057.09,1944.88) 2049.21,1937.01 2049.21,1931.1 2053.15,1927.17 2082.68,1927.17 2094.49,1915.35 2094.49,1890.75 2101.38,1883.86 U1.109@2101.38,1850.39 ; v1(2070.87,1116.14) 2070.87,1120.08 2068.9,1122.05 2072.83,1125.98 2427.84,1125.98 2488.19,1065.64 2488.19,991.45 2482.28,985.55 2482.28,982.28 2476.38,976.38 U24.67@2476.38,962.6
  Bottom w3.94: v1(2057.09,1944.88) 2051.18,1944.88 2047.24,1940.94 2039.37,1940.94 2035.43,1937.01 2035.43,1875.98 2076.77,1834.65 2076.77,1137.8 2064.96,1125.98 2064.96,1122.05 v1(2070.87,1116.14)
USB20_HOST0_DP: U1.111 U24.66 | length 1604.5
  Top w3.94: v1(2037.4,1956.69) 2039.37,1956.69 2039.37,1927.17 2047.24,1919.29 2078.74,1919.29 2086.61,1911.42 2086.61,1888.78 2081.69,1883.86 U1.111@2081.69,1850.39 ; v1(2049.21,1118.11) 2064.96,1133.86 2431.1,1133.86 2496.06,1068.9 2496.06,988.19 2492.13,984.25 U24.66@2492.13,962.6
  Bottom w3.94: v1(2037.4,1956.69) 2037.4,1952.76 2027.56,1942.91 2027.56,1872.05 2068.9,1830.71 2068.9,1141.73 2050.36,1123.19 2050.36,1119.26 v1(2049.21,1118.11)
USB20_HOST1_DM: U1.121 U13.5 | length 2468.3
  Top w3.94: U13.5@733.27,539.37 759.84,539.37 765.75,533.46 814.29,533.46 844.49,503.26 844.49,454.05 875.31,423.23 965.24,423.23 1006.58,464.57 1195.56,464.57 1649.61,918.62 1649.61,1108.27 1755.91,1214.57 1767.72,1214.57 v1(1773.62,1220.47) ; v1(1755.91,1720.47) 1761.81,1726.38 1922.55,1726.38 1976.38,1780.2 1976.38,1814.96 1983.27,1821.85 U1.121@1983.27,1850.39
  Bottom w3.94: v1(1755.91,1720.47) 1761.81,1726.38 1770.21,1726.38 1834.65,1661.94 1834.65,1555.12 1793.31,1513.78 1793.31,1219.8 1788.08,1214.57 1779.53,1214.57 v1(1773.62,1220.47)
USB20_HOST1_DP: U1.123 U13.3 | length 2480.5
  Top w3.94: U13.3@733.27,519.69 759.84,519.69 765.75,525.59 811.02,525.59 836.61,500 836.61,450.79 872.05,415.35 968.5,415.35 1009.84,456.69 1198.82,456.69 1657.48,915.35 1657.48,1105.01 1759.17,1206.69 1767.72,1206.69 v1(1773.62,1200.79) ; v1(1755.91,1740.16) 1761.81,1734.25 1919.29,1734.25 1968.5,1783.46 1968.5,1816.93 1963.58,1821.85 U1.123@1963.58,1850.39
  Bottom w3.94: v1(1755.91,1740.16) 1761.81,1734.25 1773.47,1734.25 1842.52,1665.21 1842.52,1551.86 1801.18,1510.52 1801.18,1216.54 1791.34,1206.69 1779.53,1206.69 v1(1773.62,1200.79)
USB30_2_SSRXN: C69.1 U1.167 | length 1855.8
  Top w3.94: U1.167@1451.77,1850.39 1444.88,1843.5 1444.88,1808.07 1452.76,1800.2 v1(1452.76,1785.43) ; v1(1858.27,1137.8) 1866.14,1129.92 1887.8,1129.92 1917.32,1100.39 2104.33,1100.39 2116.14,1112.2 2422.55,1112.2 2468.5,1066.25 2468.5,1045.28 C69.1@2476.38,1037.4
  Bottom w3.94: v1(1452.76,1785.43) 1446.85,1779.53 1446.85,1770.34 1455.38,1761.81 1545.95,1761.81 1569.57,1785.43 1791.34,1785.43 1885.83,1690.94 1885.83,1535.43 1842.52,1492.13 1842.52,1135.83 1846.46,1131.89 1852.36,1131.89 1856.3,1135.83 1858.27,1135.83 v1(1858.27,1137.8)
USB30_2_SSRXP: C68.1 U1.169 | length 1855.3
  Top w3.94: U1.169@1432.09,1850.39 1437.01,1845.47 1437.01,1805.12 1433.07,1801.18 v1(1433.07,1785.43) ; v1(1858.27,1116.14) 1864.17,1122.05 1884.53,1122.05 1914.06,1092.52 2108.27,1092.52 2120.08,1104.33 2419.29,1104.33 2460.63,1062.99 2460.63,1045.28 C68.1@2452.76,1037.4
  Bottom w3.94: v1(1433.07,1785.43) 1433.07,1783.46 1435.04,1783.46 1438.98,1779.53 1438.98,1763.78 1448.82,1753.94 1549.21,1753.94 1572.83,1777.56 1788.08,1777.56 1877.95,1687.68 1877.95,1539.37 1834.65,1496.06 1834.65,1132.57 1843.2,1124.02 1850.39,1124.02 v1(1858.27,1116.14)
USB30_2_SSTXN: C71.1 U1.172 | length 1966.7
  Top w3.94: U1.172@1402.56,1527.56 1402.56,1674.21 v1(1417.32,1688.98) ; v1(1814.96,1066.93) 1820.87,1072.83 1820.87,1084.95 1830.4,1094.49 1846.46,1094.49 1860.24,1080.71 1883.18,1080.71 1908.77,1055.12 2090.55,1055.12 2122.05,1086.61 2379.25,1086.61 2397.64,1068.22 2397.64,1045.28 C71.1@2405.51,1037.4
  Bottom w3.94: v1(1417.32,1688.98) 1421.26,1692.91 1444.88,1692.91 1478.35,1726.38 1702.76,1726.38 1730.32,1753.94 1774.3,1753.94 1854.33,1673.9 1854.33,1544.6 1812.99,1503.26 1812.99,1106.3 1820.87,1098.43 1820.87,1084.65 1814.96,1078.74 v1(1814.96,1066.93)
USB30_2_SSTXP: C70.1 U1.174 | length 1983.5
  Top w3.94: U1.174@1382.87,1527.56 1382.87,1676.18 v1(1415.35,1708.66) ; v1(1834.65,1066.93) 1828.74,1072.83 1828.74,1081.69 1833.66,1086.61 1843.2,1086.61 1856.97,1072.83 1879.92,1072.83 1905.51,1047.24 2094.49,1047.24 2125.98,1078.74 2375.98,1078.74 2389.76,1064.96 2389.76,1045.28 C70.1@2381.89,1037.4
  Bottom w3.94: v1(1415.35,1708.66) 1416.27,1709.58 1423.23,1702.62 1440.81,1702.62 1472.44,1734.25 1698.82,1734.25 1726.38,1761.81 1777.56,1761.81 1862.2,1677.17 1862.2,1541.34 1820.87,1500 1820.87,1109.56 1828.74,1101.69 1828.74,1084.65 1834.65,1078.74 v1(1834.65,1066.93)
USB-DET: Q9555.3 R95191.1 R95192.1 U1.87 | length 2826.4
  Top w3.94: R95191.1@196.85,2645.67 183.07,2631.89 183.07,2614.41 183.07,2576.29 192.44,2566.93 Q9555.3@281.5,2566.93 ; R95192.1@279.53,2494.09 279.53,2564.96 Q9555.3@281.5,2566.93 ; U1.87@2317.91,1850.39 2317.91,1878.94 2310.62,1886.23 2310.62,1886.71 2205.2,1992.13 1677.17,1992.13 1627.95,1942.91 1102.5,1942.91 1086.75,1958.66 580.85,1958.66 423.23,2116.28 423.23,2360.38 314.96,2468.64 314.96,2539.37 287.4,2566.93 Q9555.3@281.5,2566.93
USB_HOST_PWREN_H: R95059.2 U1.211 | length 8627.6
  Top w3.94: v1(994.09,1799.21) 1004.92,1799.21 1018.7,1812.99 U1.211@1018.7,1850.39 ; v1(3631.89,2206.69) 3631.89,2238.19 R95059.2@3635.83,2240.16
  内层3 w3.94: v1(994.09,1799.21) 968.5,1824.8 622.05,1824.8 574.8,1872.05 122.05,1872.05 -9.84,1740.16 -9.84,285.43 68.9,206.69 657.48,206.69 746.06,118.11 746.06,68.9 803.15,11.81 1011.81,11.81 1070.87,-47.24 2761.81,-47.24 2998.03,188.98 3222.44,188.98 3330.71,80.71 3444.88,80.71 3647.64,283.46 3647.64,2190.94 v1(3631.89,2206.69)
VBUS: C90194.1 C90195.1 C90528.1 J9803.1 R95191.2 U90096.1 | length 913.8
  Top w7.87: R95191.2@228.35,2645.67 226.38,2645.67 226.38,2683.07 242.13,2683.07 C90194.1@271.65,2712.6
  Top w19.68: C90528.1@27.56,2633.86 27.56,2679.13 9.84,2696.85 -68.9,2696.85 -96.46,2724.41 -96.46,2840.55 -68.9,2868.11 v2(98.43,2868.11) ; v2(169.29,2842.52) J9803.1@169.29,2787.4 169.29,2751.97 208.66,2712.6 C90194.1@271.65,2712.6
  Top w23.62: C90528.1@27.56,2633.86 27.56,2629.21 53.15,2612.82 73.17,2592.8 86.61,2572.83 U90096.1@86.61,2562.99
  other v2: 98.43,2842.52 122.05,2842.52 145.67,2842.52 122.05,2868.11 145.67,2868.11 169.29,2868.11
VCC3V3_SYS: C7.1 C8.1 C81.1 C82.1 C85.1 C86.1 C87.1 C88.1 C89.1 C90.1 C101.1 C119.1 C120.1 C121.1 C122.1 C90418.2 C90419.2 C90495.1 C90496.1 CON1.1 CON1.17 J9809.1 J9810.1 J9813.4 L4.2 R5.2 R6.2 R7.2 R8.2 R75.1 R94.1 R94.2 R95.1 R96.1 R97.1 R98.1 R99.1 R102.1 R104.1 R105.2 R106.1 R107.2 R108.2 R123.1 R124.1 R127.1 R132.2 R133.2 R951.2 R95203.2 R95206.1 U3.A2 U4.A2 U5.A2 U6.A2 U7.A2 U8.A2 U14.A2 U24.12 U24.27 U24.43 U24.44 U24.54 U24.55 U24.65 U24.73 U25.8 U36.1 U37.6 U90094.4 U90094.5 | length 14426.4
  Top w3.94: C121.1@2960.63,952.76 2942.91,970.47 2942.91,1005.91 C119.1@2960.63,1023.62 R123.1@2996.06,1023.62
  Top w5.91: 305.12,2655.51 305.12,2653.54 312.99,2645.67 312.99,2643.7 312.99,2617.13 309.55,2613.68 v1(309.06,2614.17)
  Top w7.87: 305.12,2655.51 305.12,2726.38 R75.1@330.71,2751.97 ; v1(316.93,602.36) 362.2,602.36 ; v1(316.93,685.04) 358.27,685.04 R7.2@377.95,665.35 ; v1(326.77,960.63) 342.52,960.63 U4.A2@362.2,940.94 ; v1(336.61,466.54) 354.33,466.54 362.2,458.66 U7.A2@362.2,448.82 ; v1(336.61,820.87) 354.33,820.87 362.2,812.99 U3.A2@362.2,803.15 ; U5.A2@350.39,1657.48 v1(350.39,1673.23) ; U6.A2@350.39,1803.15 v1(350.39,1820.87) ; U8.A2@362.2,586.61 362.2,602.36 ; R8.2@377.95,625.98 377.95,618.11 362.2,602.36 ; R124.1@586.61,478.35 598.43,478.35 606.3,470.47 v1(606.3,456.69) ; v1(2259.84,755.91) U24.12@2301.18,755.91 ; v1(2358.27,1003.94) 2381.89,980.32 U24.73@2381.89,962.6 ; v1(2440.94,570.87) 2444.88,574.8 U24.27@2444.88,612.2 ; U24.65@2507.87,962.6 2507.87,986.22 2511.81,990.16 v1(2511.81,1003.94) ; U24.43@2651.57,708.66 2669.29,708.66 2687.01,690.94 v1(2688.98,690.94) C101.1@2706.69,690.94 ; U24.54@2651.57,881.89 2685.04,881.89 2690.94,887.8 2696.85,887.8 C85.1@2706.69,897.64 2706.69,899.61 2683.07,899.61 2681.1,897.64 U24.55@2651.57,897.64 ; R99.1@2726.38,795.28 2742.74,795.28 2759.84,778.18 2759.84,740.16 2740.16,720.47 ; v1@2757.87,870.08 v1(2759.84,868.11) ; R105.2@2844.49,702.76 2858.27,702.76 2862.2,706.69 2862.2,727.67 2876.32,741.79 2876.32,740.16 C81.1@2877.95,740.16 ; R133.2@3385.83,484.25 R132.2@3385.83,444.88 3385.83,405.51 3387.8,403.54 ; R6.2@3397.64,1381.89 R5.2@3397.64,1421.26
  Top w9.84: v1(917.32,1334.65) 935.04,1352.36 935.04,1385.83 938.98,1389.76 U14.A2@952.76,1389.76 ; U25.8@2834.65,775.59 2834.65,763.78 2836.61,761.81 C82.1@2877.95,761.81
  Top w11.81: v1(29.53,2332.68) 53.15,2332.68 76.77,2309.06 76.77,2224.41 C7.1@47.24,2224.41 ; R95203.2@419.29,-5.91 v1(419.29,301.18) ; R951.2@998.03,295.28 v1(1015.75,301.18) ; v1(1553.15,41.34) R127.1@1570.87,41.34 C90495.1@1592.52,41.34 1604.33,41.34 1606.3,43.31 1629.92,43.31 C90496.1@1629.92,51.18 ; C88.1@2246.06,755.91 v1(2259.84,755.91) ; v1(2358.27,1003.94) C86.1@2358.27,1017.72 ; C89.1@2440.94,557.09 v1(2440.94,570.87) ; v1(2511.81,1003.94) C87.1@2511.81,1017.72 ; R97.1@2588.58,537.4 R96.1@2622.05,537.4 v1(2637.8,537.4) ; U24.43@2651.57,708.66 2637.8,708.66 2637.8,724.41 U24.44@2651.57,724.41 ; C85.1@2706.69,897.64 2706.69,924.7 2712.6,929.13 C90.1@2716.54,929.13 ; R95.1@2726.38,720.47 2750,720.47 ; v1(2734.25,929.13) 2734.25,933.07 2763.78,962.6 R106.1@2773.62,962.6 R104.1@2809.06,962.6 R102.1@2844.49,962.6 ; R98.1@2736.22,870.08 v1@2757.87,870.08 ; 2740.16,720.47 2750,720.47 ; R105.2@2844.49,702.76 R107.2@2811.02,702.76 R108.2@2777.56,702.76 2767.72,702.76 2750,720.47 ; C82.1@2877.95,761.81 C81.1@2877.95,740.16 v2(2899.61,746.06) ; U90094.4@3177.17,2137.8 v1(3210.63,2137.8) ; R6.2@3397.64,1381.89 3400.7,1381.89 v1(3405.51,1360.24)
  Top w15.75: C122.1@677.17,342.52 v1(700.79,342.52) ; v1(1257.87,74.8) v1(1273.62,74.8) 1267.22,68.41 J9813.4@1267.22,37.7 ; v1(2637.8,537.4) 2665.35,537.4 R94.2@2681.1,521.65 ; v1(2655.51,576.77) R94.1@2681.1,576.77 ; C90.1@2716.54,929.13 v1(2734.25,929.13) ; v1(2864.17,1242.13) R95206.1@2864.17,1259.84 ; v2(2899.61,746.06) v2(2899.61,765.75) ; v1(2933.07,933.07) v1@2935.04,933.07 ; C120.1@2976.38,757.87 2976.38,756.89 2935.04,756.89 v1@2935.04,933.07 ; U37.6@3027.56,952.76 C121.1@2960.63,952.76 2950.79,952.76 2935.04,937.01 v1@2935.04,933.07
  Top w19.68: U36.1@625.98,342.52 C122.1@677.17,342.52 ; v1(1629.92,29.53) C90496.1@1629.92,51.18 ; U90094.4@3177.17,2137.8 U90094.5@3177.17,2216.54 ; C90418.2@3370.08,368.11 C90419.2@3405.51,368.11 ; v1(3484.25,370.08) 3484.25,403.54 J9809.1@3500,403.54
  Top w31.5: v2(3265.75,332.68) 3316.93,332.68 3387.8,403.54 J9809.1@3500,403.54
  Top w78.74: v1(41.34,1885.83) v1@39.37,1885.83 ; CON1.17@140.94,1340.94 96.99,1340.94 39.37,1398.57 v1@39.37,1885.83 ; CON1.1@140.94,2140.94 39.37,2140.94 v1@39.37,1885.83
  内层3 w11.81: v1(350.39,1673.23) 393.7,1629.92 597.89,1629.92 786.87,1440.94 879.92,1440.94 915.35,1405.51 915.35,1336.61 v1(917.32,1334.65) ; v1(2958.66,1444.88) 3066.93,1553.15 3066.93,1896.65 3173.23,2002.95 3173.23,2100.39 v1(3210.63,2137.8)
  内层3 w15.75: v1(1273.62,74.8) 1307.09,41.34 v1(1553.15,41.34) ; v1(1598.43,305.12) 1629.92,273.62 v1(1629.92,29.53)
  Power4 w11.81: v1(2933.07,933.07) 3129.92,933.07 3137.8,940.94 3137.8,1301.18 3145.67,1309.06 3273.62,1309.06 3295.28,1330.71 3386,1330.71 3405.51,1350.22 v1(3405.51,1360.24)
  Bottom w11.81: v1(606.3,456.69) 671.26,456.69 700.79,427.17 v1(700.79,342.52) ; v1(2655.51,576.77) 2683.07,604.33 2917.32,604.33 2937.01,624.02 v1(2937.01,736.22)
  Bottom w15.75: v1(29.53,2332.68) 29.53,2356.3 57.09,2383.86 57.09,2468.5 74.8,2486.22 181.1,2486.22 v1(309.06,2614.17) ; v1(41.34,1885.83) 305.12,1885.83 336.61,1854.33 ; v1(350.39,1820.87) 336.61,1807.09 336.61,1854.33 ; v1(700.79,342.52) 688.98,330.71 367.83,330.71 336.61,361.93 v1(336.61,466.54) 336.61,582.68 v1(316.93,602.36) v1(316.93,685.04) 316.93,746.06 336.61,765.75 v1(336.61,820.87) 316.93,840.55 316.93,918.45 326.77,928.29 v1(326.77,960.63) 326.77,1055.12 348.43,1076.77 348.43,1606.3 336.61,1618.11 336.61,1659.45 v1(350.39,1673.23) 350.39,1750 336.61,1763.78 336.61,1854.33
  Bottom w19.68: v1(700.79,342.52) 755.91,287.4 755.91,57.96 811.9,1.97 1045.28,1.97 1171.26,127.95 1681.1,127.95 1862.2,309.06 2352.36,309.06 2620.08,576.77 v1(2655.51,576.77) ; v2(3482.28,1324.8) 3566.93,1240.16 3566.93,564.96 3484.25,482.28 v1(3484.25,370.08)
VCC3V3_WF: C56.1 C57.1 C58.1 C90529.1 C90532.1 C90533.1 L90015.2 R57.2 R60.2 R65.2 R66.2 R95189.2 R95190.2 R95199.1 R95227.2 U13.2 U13.4 U13.72 U13.74 U90103.6 | length 2448.6
  Top w5.91: v1(1181.1,1153.54) 1182.47,1153.54 1191.33,1162.4 1219.49,1162.4 R95190.2@1236.22,1145.67
  Top w7.87: v1(978.35,1218.5) 1000.99,1218.51 U13.74@1026.58,1218.51 ; R57.2@1137.8,673.23 v1(1157.48,673.23) ; v1(1181.1,1124.02) 1185.04,1127.95 1218.5,1127.95 R95189.2@1236.22,1110.24
  Top w11.81: R95227.2@657.48,1066.93 661.42,1070.87 v1(681.1,1070.87) ; v1(1161.42,952.76) R60.2@1161.42,972.44 ; v1(1242.13,994.09) 1239.72,972.44 R65.2@1236.22,972.44 1236.22,972.68 1236.46,972.68 1256.38,952.76 1290.86,952.76 1308.82,970.71 1307.09,970.71 R66.2@1307.09,972.44 ; U90103.6@1921.26,614.17 v1(1921.26,637.8) ; R95199.1@1992.13,604.33 C90529.1@1992.13,637.8 v1(2011.81,637.8)
  Top w19.68: v2(1602.36,470.47) C90533.1@1602.36,511.81 1653.54,511.81 C90532.1@1653.54,519.69
  Top w23.62: C90532.1@1653.54,519.69 1757.87,519.69 L90015.2@1757.87,521.65
  Bottom w7.87: v1(681.1,1070.87) 836.61,1070.87 978.35,1212.6 v1(978.35,1218.5) ; 1602.36,507.87 1602.36,629.92 1627.95,655.51 1903.54,655.51 v1(1921.26,637.8)
  Bottom w11.81: v1(1161.42,952.76) 1161.42,974.41 1181.1,994.09 v1(1242.13,994.09)
  Bottom w15.75: v2(1602.36,470.47) 1602.36,507.87 ; v1(1921.26,637.8) v1(2011.81,637.8)
  Bottom w19.68: v2(1602.36,470.47) v2(1624.02,470.47) v2(1645.67,470.47)
  Bottom w39.37: v2(1100.39,525.59) 1100.39,394.43 1146.4,348.43 1253.94,348.43 1336.61,431.1 1562.99,431.1 v2(1602.36,470.47)
  other v2: 1080.71,525.59 1080.71,545.28 1100.39,545.28 1080.71,564.96 1100.39,564.96 1088.58,1187.01 1108.27,1187.01 1088.58,1206.69 1108.27,1206.69
VCC4V0_SYS: C90422.1 C90474.1 C90475.1 C90520.2 C90522.1 C90524.1 L5001.2 R95051.1 U1.251 U1.252 U1.253 U1.254 U1.255 U1.256 U1.257 U1.258 U1.259 U1.260 | length 5594.8
  Top w11.81: R95051.1@2781.5,590.55 2781.5,602.36 2793.31,614.17 3007.4,614.17 3043.07,578.5 3041.34,578.5 C90520.2@3041.34,576.77
  Top w15.75: C90520.2@3041.34,576.77 3129.92,576.77 3189.96,516.73 3200.79,516.73 C90475.1@3200.79,519.69
  Top w19.68: C90474.1@3267.72,464.57 3267.72,458.66 C90422.1@3320.87,458.66
  Top w31.5: C90475.1@3200.79,519.69 3200.79,521.65 3267.72,521.65 C90524.1@3267.72,519.69
  Power4 w39.37: v1(576.77,1801.18) 633.86,1858.27 1663.27,1858.27 1677.05,1872.05 1760.83,1872.05 1782.48,1850.39 3557.09,1850.39 3624.02,1783.46 3624.02,634.59 3509.11,519.69 3291.34,519.69 v2(3265.75,494.09)
  Bottom w39.37: v1(559.06,1484.25) 559.06,1555.48 555.12,1559.42 555.12,1724.41 559.06,1728.35 v1(559.06,1783.46)
  other v1: 541.34,1466.54 559.06,1466.54 576.77,1466.54 541.34,1484.25 576.77,1484.25 576.77,1783.46 594.49,1783.46 559.06,1801.18 594.49,1801.18
  other v2: 3246.06,494.09 3285.43,494.09 3309.06,503.94 3332.68,503.94 3356.3,503.94 3309.06,527.56 3332.68,527.56 3356.3,527.56
VCC5V0_SYS: C9.1 C102.1 C103.1 C117.1 C118.1 C90414.1 C90415.1 C90425.1 C90427.1 C90428.1 C90521.1 C90530.1 C90531.1 CON1.2 CON1.4 D5001.2 D90007.2 D90010.1 J13.1 Q9533.1 R9.2 R110.1 R113.1 R122.1 R95048.2 R95198.2 R95201.1 U26.3 U30.5 U34.5 U37.3 U41.6 U90086.1 U90086.5 U90087.2 U90096.5 U90103.3 | length 4070.8
  Top w3.94: D90010.1@3202.76,2078.74 D90010.1@3202.76,2082.68 ; D90007.2@3385.83,2413.39 v1(3440.94,2413.39)
  Top w7.87: R95198.2@-122.05,2429.13 -122.05,2372.72 -83.97,2334.65 8.21,2334.65 21.99,2348.43 56.89,2348.43 135.83,2269.49 135.83,2246.06 CON1.2@240.94,2140.94 ; U30.5@1692.92,2220.47 1732.28,2220.47 1732.28,2116.14 1718.5,2102.36 R113.1@1694.88,2102.36 ; v1(2791.34,366.14) 2792.32,366.14 v1@2793.31,365.16 ; C90425.1@2793.31,348.43 v1@2793.31,365.16 ; U90086.5@2799.21,395.67 2799.21,371.06 v1@2793.31,365.16 ; R122.1@3066.93,1023.62 3090.55,1047.24 3169.29,1047.24 3190.94,1025.59 3190.94,948.82 3187.01,944.88 3162.42,944.88 3160.45,946.85 C117.1@3129.92,946.85
  Top w11.81: C9.1@350.39,2027.56 385.83,2027.56 R9.2@405.51,2007.87 ; C90530.1@1866.14,492.13 1866.14,460.63 1879.92,446.85 1968.5,446.85 1992.13,470.47 R95201.1@1992.13,568.9 ; C90521.1@2698.82,466.54 2714.57,482.28 2720.47,482.28 R95048.2@2720.47,505.91 ; R110.1@3066.93,1350.39 3068.66,1350.39 3068.66,1352.12 3090.55,1330.23 3090.55,1305.12 3122.05,1273.62 C102.1@3129.92,1273.62
  Top w15.75: U90103.3@1854.33,574.8 1862.2,574.8 1862.2,543.31 C90531.1@1864.17,543.31 ; v1(2494.09,1352.36) Q9533.1@2494.09,1379.92
  Top w19.68: v2(86.61,2417.32) U90096.5@86.61,2452.75 v2(114.17,2452.76) ; v1(1730.32,216.54) 1738.92,207.94 1738.92,206.69 1751.97,219.75 ; 1785.43,267.72 1751.97,234.25 1751.97,219.75 ; 1827.76,141.73 1792.32,106.3 1734.25,106.3 C90428.1@1714.57,110.24 1714.57,175.2 C90427.1@1711.35,175.2 1711.35,179.13 1751.97,219.75 ; C90531.1@1864.17,543.31 1864.17,492.13 C90530.1@1866.14,492.13 ; D90010.1@3202.76,2082.68 3226.38,2082.68 3228.35,2080.71 3244.09,2096.46 v1(3244.09,2141.73)
  Top w23.62: 1785.43,267.72 1830.71,312.99 1830.71,418.29 1866.14,453.72 1866.14,460.63
  GND02 w3.94: v1(3440.94,2476.38) v1(3440.94,2450.79) v1(3440.94,2431.1) v1(3440.94,2413.39) v1(3440.94,2395.67) v1(3464.57,2395.67) v1(3464.57,2415.35) v1(3464.57,2433.07) v1(3464.57,2454.72) v1(3464.57,2476.38)
  内层3 w15.75: v1(2494.09,1352.36) 2521.65,1324.8 3120.08,1324.8 v1(3163.39,1281.5)
  Power4 w19.68: v2(86.61,2417.32) 114.17,2417.32 v2(114.17,2452.76)
  Power4 w31.5: 114.17,2417.32 114.17,2258.27 231.5,2140.94 CON1.2@240.94,2140.94
  Bottom w11.81: v2(2604.33,409.45) v2(2627.95,409.45) 2671.26,409.45 2718.5,362.2 2718.5,317.46 2728.88,307.09 2782.93,307.09 2795.28,319.43 2795.28,341.27 2791.34,345.2 v1(2791.34,366.14)
  other v1: 1694.88,216.54 1712.6,216.54 1694.88,234.25 1712.6,234.25 1730.32,234.25 3167.32,933.07 3187.01,933.07 3167.32,954.72 3187.01,954.72 3163.39,1265.75 3181.1,1265.75 3181.1,1281.5 3448.82,2177.17 3472.44,2177.17 3448.82,2194.88 3472.44,2196.85 3448.82,2212.6 3472.44,2214.57
  other v2: 2509.84,409.45 2533.46,409.45 2557.09,409.45 2580.71,409.45 2568.9,437.01 2568.9,460.63 2568.9,486.22 2344.49,2102.36 2368.11,2102.36 2344.49,2124.02 2368.11,2125.98 1726.38,2214.57 1746.06,2214.57 1726.38,2234.25 1746.06,2234.25
VCC5V_HDMI_TX1: C90469.1 C90484.1 D5005.1 D90010.2 J6.H18 | length 2503
  Top w3.94: C90484.1@3055.12,2064.96 3055.12,2066.93 C90484.1@3057.09,2068.9 ; D90010.2@3108.27,2078.74 D90010.2@3108.27,2082.68
  Top w11.81: v1(2620.08,1464.57) 2696.85,1464.57 2734.25,1427.17 2734.25,1206.69 2711.12,1183.56 2710.14,1183.56 2681.1,1154.53 2666.34,1154.53 D5005.1@2665.35,1153.54
  Top w15.75: D5005.1@2665.35,1149.61 D5005.1@2665.35,1153.54
  Top w19.68: J6.H18@2972.44,2720.47 3143.7,2720.47 v2(3159.45,2704.72) C90469.1@3181.1,2704.72 ; v2(3015.75,2120.08) 3057.09,2078.74 C90484.1@3057.09,2070.87 ; C90484.1@3057.09,2068.9 C90484.1@3057.09,2070.87 ; D90010.2@3108.27,2082.68 3096.46,2070.87 C90484.1@3057.09,2070.87
  Bottom w11.81: v1(2620.08,1464.57) 2620.08,1545.28 2604.33,1561.02 2604.33,1675.2 2718.5,1789.37 2860.6,1789.37 2876.35,1773.62 2932.71,1773.62 3027.56,1868.47 3027.56,1970.47 3047.24,1990.16 3047.24,2112.2 3039.37,2120.08
  Bottom w19.68: v2(3015.75,2120.08) 3039.37,2120.08 3080.82,2120.08 3173.23,2212.48 3173.23,2460.63 3135.83,2498.03 3135.83,2681.1 v2(3159.45,2704.72)